# Altium PCB Sheet_1_2023-10-06.pcbdoc
Units mil, origin at the board's own origin, x right, y up, seen from the top; angles counter-clockwise.
Board outline 4947 x 4947 mil, 2 copper layers (Top Layer, Bottom Layer); 44 components, 45 nets, 134 pads, 41 vias.
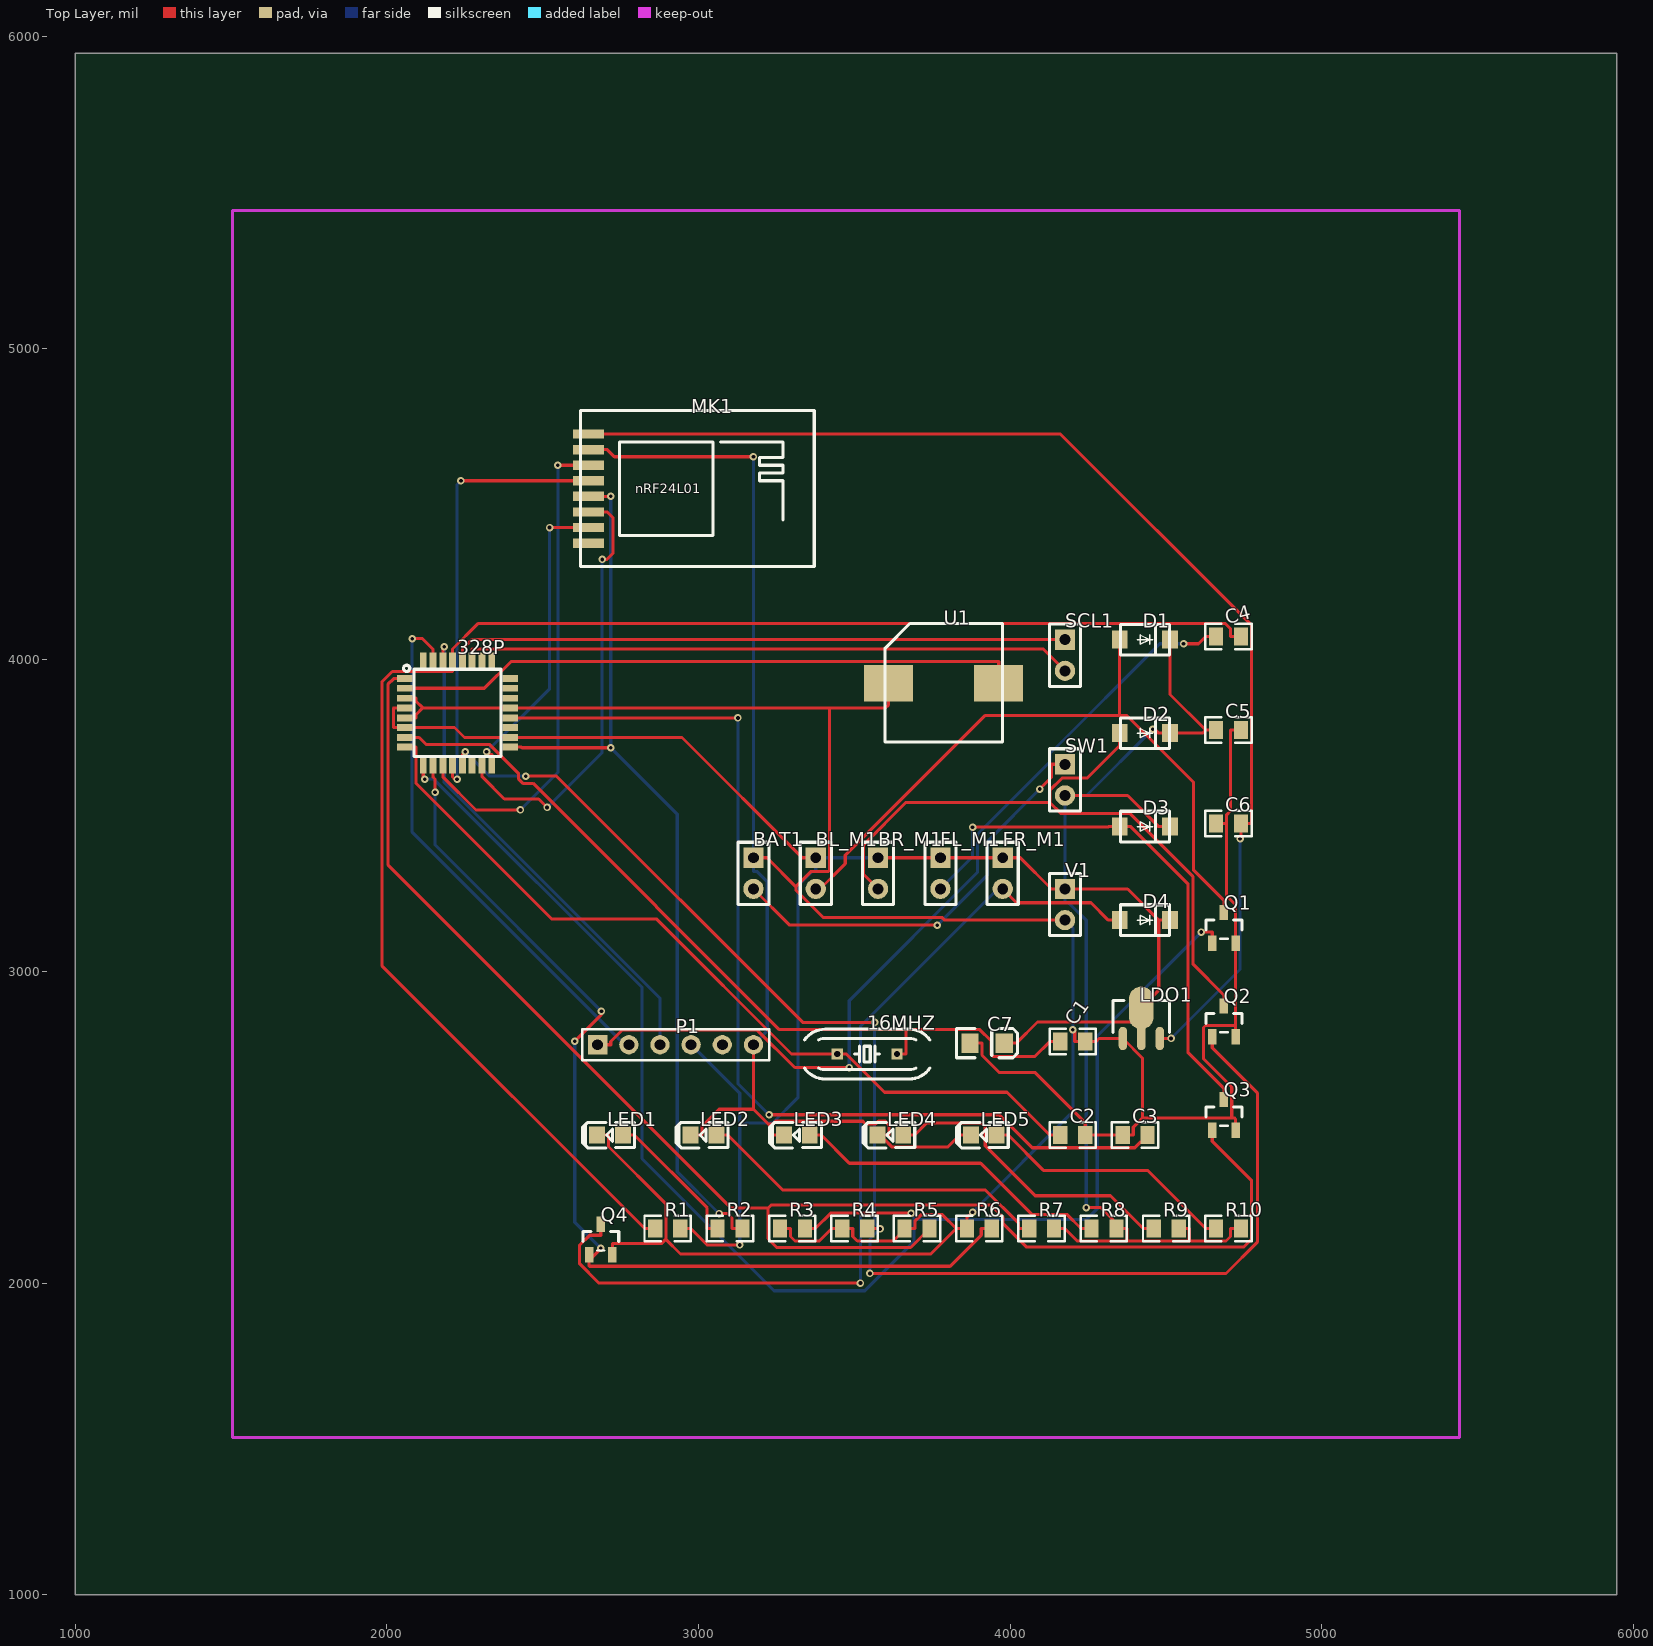
[diagram p0: Top Layer view]
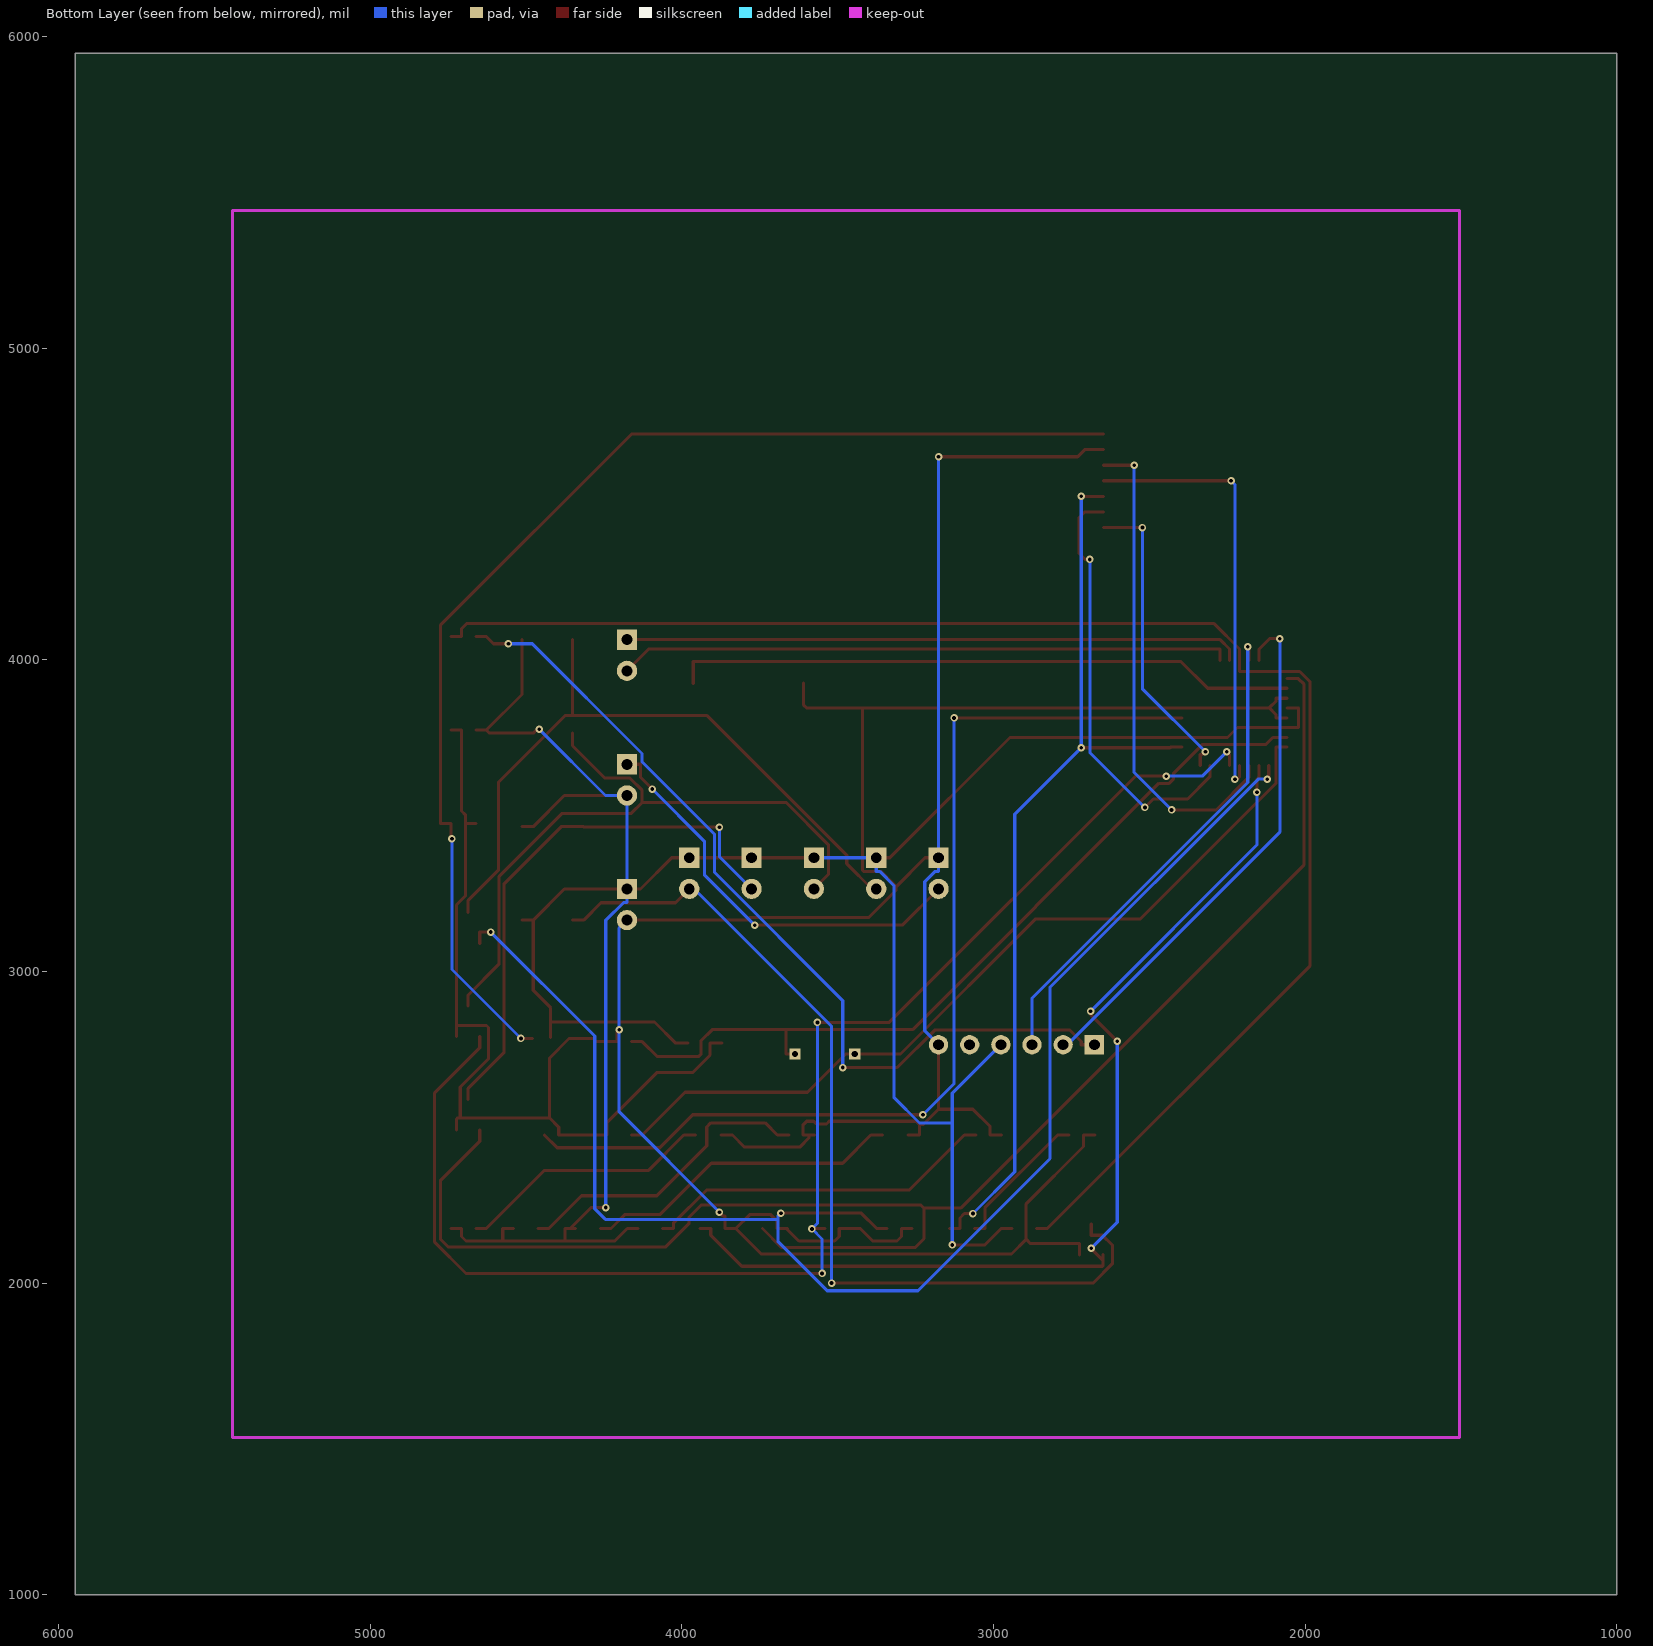
[diagram p1: Bottom Layer view, seen from below]

## Layer stack, top to bottom
Top Layer: signal copper (thickness not stored)
Dielectric: dielectric 12.6, FR-4, Dk 4.8
Bottom Layer: signal copper (thickness not stored)

## Board outline
5947,1000 1000,1000 1000,5947 5947,5947

## Components (designator, comment, footprint, x,y, rotation, side; value= is the part's Value field where it differs from the comment)
16MHZ "49S16.9344M20PF20PPMROHS" HC-49S 3541.48,2735.09 r0 top
328P "ATMEGA328P-AU" TQFP32 2226.48,3830.09 r0 top
BAT1 "Bat" H2-2.54 3176.48,3315.09 r0 top
BL_M1 "P125-1102A0BS116A3" H2-2.54 3376.48,3315.09 r0 top
BR_M1 "P125-1102A0BS116A3" H2-2.54 3576.48,3315.09 r0 top
C1 "22pF" 0805 4161.48,2775.09 r0 top
C2 "22pF" 0805 4161.48,2475.09 r0 top
C3 "0.1uF" 0805 4361.48,2475.09 r0 top
C4 "0.1uF" 0805 4661.48,4075.09 r0 top
C5 "0.1uF" 0805 4661.48,3775.09 r0 top
C6 "0.1uF" 0805 4661.48,3475.09 r0 top
C7 "10UF-16V-10%(TANT)" EIA3216 3926.48,2770.09 r0 top
D1 "SS12" SMA(DO-214AC) 4436.48,4065.09 r0 top
D2 "SS12" SMA(DO-214AC) 4436.48,3765.09 r0 top
D3 "SS12" SMA(DO-214AC) 4436.48,3465.09 r0 top
D4 "SS12" SMA(DO-214AC) 4436.48,3165.09 r0 top
FL_M1 "P125-1102A0BS116A3" H2-2.54 3776.48,3315.09 r0 top
FR_M1 "P125-1102A0BS116A3" H2-2.54 3976.48,3315.09 r0 top
LDO1 "HT7333-1" SOT-89(SOT-89-3) 4426.48,2885.09 r0 top
LED1 "Red" LED-0805 2716.48,2475.09 r0 top
LED2 "Red" LED-0805 3016.48,2475.09 r0 top
LED3 "Red" LED-0805 3316.48,2475.09 r0 top
LED4 "Red" LED-0805 3616.48,2475.09 r0 top
LED5 "Red" LED-0805 3916.48,2475.09 r0 top
MK1 "AS01-ML01S" NRF24L01_SMD+ 2646.48,4725.09 r0 top
P1 "Female header 1*6p" HDR-6X1/2.54 2876.48,2765.09 r0 top
Q1 "SI2302-TP" SOT-23(SOT-23-3) 4686.48,3190.09 r0 top
Q2 "SI2302-TP" SOT-23(SOT-23-3) 4686.48,2890.09 r0 top
Q3 "SI2302-TP" SOT-23(SOT-23-3) 4686.48,2590.09 r0 top
Q4 "SI2302-TP" SOT-23(SOT-23-3) 2686.48,2190.09 r0 top
R1 "10kΩ" 0805 2861.48,2175.09 r0 top
R2 "330" 0805 3061.48,2175.09 r0 top
R3 "10k" 0805 3261.48,2175.09 r0 top
R4 "10k" 0805 3461.48,2175.09 r0 top
R5 "10k" 0805 3661.48,2175.09 r0 top
R6 "10k" 0805 3861.48,2175.09 r0 top
R7 "330" 0805 4061.48,2175.09 r0 top
R8 "330" 0805 4261.48,2175.09 r0 top
R9 "330" 0805 4461.48,2175.09 r0 top
R10 "330" 0805 4661.48,2175.09 r0 top
SCL1 "P125-1102A0BS116A3" H2-2.54 4176.48,4015.09 r0 top
SW1 "SW" H2-2.54 4176.48,3615.09 r0 top
U1 "NO" "LEB9650 BUZZER 9.6X9.6X5MM" 3786.48,3925.09 r0 top
V1 "Vcc" H2-2.54 4176.48,3215.09 r0 top

## Footprints (in the part's own frame and the unit in brackets; to place one, negate y for a bottom-side part, rotate by r counter-clockwise, add the part's x,y. Pads: shape width x height; smd on the part's side, far side on the other; paste and mask are expansions set on the pad)
0805 [mm]
  rect 1.16x1.47 smd paste+0 mask+0.051: 1(0,0) 2(2.032,0)
  silkscreen extent -0.88,-1.04 2.89,1.04
EIA3216 [mil]
  rect 55.1x63 smd paste+0 mask+2: A(55,0) C(-55,0)
  silkscreen extent -98,-47 98,47
H2-2.54 [mil]
  rect 65x65 hole 35 paste+0 mask+2: 1(0,50)
  round 65 hole 35 paste+0 mask+2: 2(0,-50)
  silkscreen extent -50,-100 50,100
HC-49S [mil]
  rect 35.7x35.7 hole 20 paste+0 mask+2: 1(-96,0) 2(96,0)
  silkscreen extent -201,-80 201,80
HDR-6X1/2.54 [mil]
  rect 62x62 hole 35 paste+0 mask+2: 1(-200,0)
  round 62 hole 35 paste+0 mask+2: 2(-100,0) 3(0,0) 4(100,0) 5(200,0) 6(300,0)
  silkscreen extent -250,-50 350,50
"LEB9650 BUZZER 9.6X9.6X5MM" [mm]
  rect 4x3 smd paste+0 mask+0.051: +(4.5,0) -(-4.5,0)
  silkscreen extent -4.76,-4.8 4.8,4.88
LED-0805 [mil]
  rect 51.2x55.1 smd paste+0 mask+2: 1(40.7,0.05) 2(-42,0.05)
  silkscreen extent -88,-41 78,40
NRF24L01_SMD+ [mil]
  rect 100x30 smd paste+0 mask+2: 1(0,0) 2(0,-50) 3(0,-100) 4(0,-150) 5(0,-200) 6(0,-250) 7(0,-300) 8(0,-350)
  silkscreen extent -25,-425 725,75
SMA(DO-214AC) [mil]
  rect 50x57.9 smd paste+0 mask+2: 1(-85,0) 2(77,0)
  silkscreen extent -82,-49 75,49
SOT-23(SOT-23-3) [mm]
  rect 0.7x1.25 smd paste+0 mask+0.051: 1(-0.95,-2.52) 2(0.95,-2.52) 3(0,-0.02)
  silkscreen extent -1.46,-2.17 1.46,-0.62
SOT-89(SOT-89-3) [mm]
  oval 0.7x1.9 smd paste+0 mask+0.051: 1(-1.628,-2.54) 3(1.374,-2.54)
  oval 0.7x2.1 smd paste+0 mask+0.051: 2(-0.127,-2.441)
  oval 2x3.5 smd paste+0 mask+0.051: 2(-0.127,-0.041)
  silkscreen extent -2.43,-2.04 2.17,0.56
TQFP32 [mil]
  rect 50x22 smd paste+0 mask+2: 1(-169,110) 2(-169,79) 3(-169,47) 4(-169,16) 5(-169,-16) 6(-169,-47) 7(-169,-79) 8(-169,-110) 17(169,-110) 18(169,-79) 19(169,-47) 20(169,-16) 21(169,16) 22(169,47) 23(169,79) 24(169,110)
  rect 22x50 smd paste+0 mask+2: 9(-110,-169) 10(-79,-169) 11(-47,-169) 12(-16,-169) 13(16,-169) 14(47,-169) 15(79,-169) 16(110,-169) 25(110,169) 26(79,169) 27(47,169) 28(16,169) 29(-16,169) 30(-47,169) 31(-79,169) 32(-110,169)
  silkscreen extent -173,-140 140,153

## Via types
v1: diameter 24.02, hole 12.01, Top Layer to Bottom Layer, tented both sides, 41 vias

## Nets (pads, with @x,y where several pads share a name; then routed paths per layer and width w, separated by ;. In a path a pad name is that pad's centre, name@x,y a point inside that pad or via, vN(x,y) a via of type N, cw(c..) or ccw(c..) an arc to the next point about the centre after c; other vN are vias at no path point)
3.3V: C6.2 LDO1.3 MK1.1 | length 3872.4
  Top Layer w10: MK1.1 4161.38,4725.09 4775.38,4111.09 4775.38,3475.15 4775.31,3475.08 C6.2 4741.49,3429.53 v1(4738.22,3426.26) ; LDO1.3 v1(4516.8,2785.09)
  Bottom Layer w10: v1(4516.8,2785.09) 4738.22,3006.51 v1(4738.22,3426.26)
16MHZ_1: 16MHZ.1 328P.8 C2.1 | length 2687.7
  Top Layer w10: 328P.8 2093.47,3720.09 2093.47,3603.98 2528.29,3169.16 2864.7,3169.16 3298.77,2735.09 16MHZ.1 3459.9,2735.09 3474.32,2735.09 3596.98,2612.43 3990.31,2612.43 4127.66,2475.08 C2.1
16MHZ_2: 16MHZ.2 328P.7 C1.1 | length 2690.5
  Top Layer w10: 328P.7 2103.47,3751.09 2125.62,3728.94 2328.57,3728.94 2422.82,3634.69 2422.82,3617.51 2436.33,3604 2469.24,3604 3259.65,2813.59 3666.32,2813.59 ; 16MHZ.2 3666.32,2735.09 3666.32,2813.59 ; C1.1 4127.66,2775.08 4080.09,2727.51 3945.8,2727.51 3939.41,2733.9 3939.41,2777.21 3903.03,2813.59 3666.32,2813.59
328P_14: 328P.14
328P_19: 328P.19
328P_22: 328P.22
328P_23: 328P.23
328P_24: 328P.24
328P_25: 328P.25
328P_26: 328P.26
328P_32: 328P.32
BL: 328P.9 Q1.1 R3.2 | length 4838.9
  Top Layer w10: 328P.9 2116.48,3622.85 v1(2121.82,3617.51) ; R3.2 3375.31,2175.08 3424.63,2224.4 v1(3682.46,2224.4) ; v1(4613.6,3126.49) 4649.08,3126.49 Q1.1
  Bottom Layer w10: v1(2121.82,3617.51) 2150.63,3617.51 2818.69,2949.45 2818.69,2399.37 3242.55,1975.51 3533.6,1975.51 3692.36,2134.27 3692.36,2204.59 ; v1(3682.46,2224.4) 3692.36,2214.5 3692.36,2204.59 ; v1(4613.6,3126.49) 4280.07,2792.96 4280.07,2238.76 4245.9,2204.59 3692.36,2204.59
BR: 328P.13 Q2.1 R4.2 | length 4594.2
  Top Layer w10: 328P.13 2242.48,3697.08 2243.83,3697.08 v1(2251.77,3705.02) ; v1(2445.88,3627.06) 2544.29,3627.06 3334.7,2836.65 v1@3565.05,2836.65 ; R4.2 3581.53,2175.08 v1(3582.74,2173.87) ; v1(3550.36,2030.93) 4693.34,2030.93 4793.7,2131.29 4793.7,2610.67 4649.08,2755.29 Q2.1
  Bottom Layer w10: v1(2251.77,3705.02) 2329.73,3627.06 v1(2445.88,3627.06) ; v1(3550.36,2030.93) 3550.36,2141.49 v1(3582.74,2173.87) 3565.05,2191.56 v1@3565.05,2836.65
  other v1: 3565.05,2836.65
C3_2: 328P.20 C3.2 | length 3321.9
  Top Layer w10: 328P.20 v1(3126.48,3814.09) ; v1(3226.54,2540.39) 3965.2,2540.39 4071.3,2434.29 4400.7,2434.29 C3.2
  Bottom Layer w10: v1(3126.48,3814.09) 3126.48,2640.45 v1(3226.54,2540.39)
CE: 328P.11 MK1.3 | length 1583.3
  Top Layer w10: 328P.11 2179.48,3625.1 2286.04,3518.54 v1(2428.41,3518.54) ; v1(2548.62,4625.09) MK1.3
  Bottom Layer w10: v1(2428.41,3518.54) 2548.62,3638.75 v1(2548.62,4625.09)
CSN: 328P.12 MK1.4 | length 1425.4
  Top Layer w10: 328P.12 2210.48,3625.1 2218.13,3617.45 v1(2225.03,3617.45) ; v1(2237.59,4575.09) MK1.4
  Bottom Layer w10: v1(2225.03,3617.45) 2225.03,4562.53 v1(2237.59,4575.09)
CTS: P1.5
D1_1: BL_M1.2 D1.1 Q1.3 | length 2249.9
  Top Layer w10: BL_M1.2 3390.08,3265.09 3471.22,3346.23 3471.22,3373.29 3919.13,3821.2 4351.48,3821.2 ; D1.1 4351.48,3821.2 ; Q1.3 4686.48,3228.52 4588.57,3326.43 4588.57,3608.22 4375.59,3821.2 4351.48,3821.2
D2_1: BR_M1.2 D2.1 Q2.3 | length 2192.1
  Top Layer w10: BR_M1.2 3530.02,3311.55 3530.02,3407.25 3665.13,3542.36 4127.79,3542.36 ; D2.1 4351.48,3725.15 4247.09,3620.76 4166.98,3620.76 4127.79,3581.57 4127.79,3542.36 ; Q2.3 4686.48,2924.89 4586.89,3024.48 4586.89,3305.4 4384.63,3507.66 4162.49,3507.66 4127.79,3542.36
D3_1: D3.1 FL_M1.2 Q3.3 | length 1749.2
  Top Layer w10: v1(3879.73,3463.43) 4313.83,3463.43 4315.49,3465.09 D3.1 4387.47,3465.09 4570.83,3281.73 4570.83,2740.54 4686.48,2624.89 Q3.3
  Bottom Layer w10: FL_M1.2 3879.73,3368.34 v1(3879.73,3463.43)
D4_1: D4.1 FR_M1.2 Q4.3 | length 2983.7
  Top Layer w10: Q4.3 2686.48,2153.69 2650.88,2153.69 2617.64,2120.45 2617.64,2063.19 2680.83,2000 v1(3520,2000) ; FR_M1.2 4020.81,3220.76 4259.82,3220.76 4315.49,3165.09 D4.1
  Bottom Layer w10: v1(3520,2000) 3520,2824.21 3960.88,3265.09 FR_M1.2
DTR: C4.1 P1.1 | length 2846.2
  Top Layer w10: P1.1 2718.47,2765.09 2718.47,2775.59 2754.78,2811.9 3189.14,2811.9 3309.24,2691.8 v1(3483.78,2691.8) ; v1(4556.92,4052.15) 4604.73,4052.15 4627.66,4075.08 C4.1
  Bottom Layer w10: v1(3483.78,2691.8) 3483.78,2906.62 3895.79,3318.63 3895.79,3440.54 4128.15,3672.9 4128.15,3699.71 4480.59,4052.15 v1(4556.92,4052.15)
FL: 328P.1 Q3.1 R5.2 | length 5007.1
  Top Layer w10: 328P.1 2021.49,3940.09 2003.17,3921.77 2003.17,3343.05 3105.75,2240.47 3223,2240.47 ; R5.2 3680.81,2114.4 3251.22,2114.4 3223,2142.62 3223,2240.47 ; Q3.1 4649.08,2455.29 4775.38,2328.99 4775.38,2141.57 4749.31,2115.5 4053.52,2115.5 3976.81,2192.21 3976.81,2212.17 3938.27,2250.71 3233.24,2250.71 3223,2240.47
FR: 328P.10 Q4.1 R6.2 | length 3288.7
  Top Layer w10: 328P.10 2147.48,3625.1 2154.55,3618.03 v1(2154.55,3575.51) ; v1(2602.88,2775.95) 2688.4,2861.47 v1(2688.4,2872.5) ; Q4.1 Q4.1@2649.08,2073.09 ; v1(2686.48,2111.49) 2686.48,2110.49 Q4.1@2649.08,2073.09 ; R6.2 3907.66,2175.08 3907.66,2153.83 3807.82,2053.99 2650.38,2053.99 2649.08,2055.29 Q4.1@2649.08,2073.09
  Bottom Layer w10: v1(2154.55,3575.51) 2154.55,3406.35 v1(2688.4,2872.5) ; v1(2602.88,2775.95) 2602.88,2195.09 v1(2686.48,2111.49)
GND: 328P.3 328P.5 328P.21 BAT1.1 C1.2 C2.2 C3.1 C5.2 C6.1 C7.C LDO1.1 LED1.2 LED2.2 LED3.2 LED4.2 LED5.2 MK1.2 P1.6 Q1.2 Q2.2 Q3.2 Q4.2 R3.1 R4.1 R5.1 R6.1 U1.- V1.2 | length 13940.1
  Top Layer w10: 328P.5 2093.47,3814.09 2093.47,3824.62 2114.94,3846.09 ; 328P.3 2093.47,3877.09 2093.47,3867.56 2114.94,3846.09 ; MK1.2 2707.47,4675.09 2730.21,4652.35 v1@3176.48,4652.35 ; LED1.2 2711.07,2475.14 2711.07,2438.55 2895.38,2254.24 2895.38,2140.44 ; Q4.2 2723.88,2126.49 2881.43,2126.49 2895.38,2140.44 ; LED2.2 2986.21,2475.14 3011.07,2475.14 3011.07,2502.58 3066.33,2557.84 3176.48,2557.84 ; P1.6 3176.48,2557.84 ; BAT1.1 3219.97,3365.09 3312.68,3272.39 3361.82,3321.53 3417.13,3321.53 3420.04,3324.44 3420.04,3846.09 ; R3.1 3295.31,2175.08 3295.31,2149.71 3309.93,2135.09 3387.67,2135.09 3427.66,2175.08 R4.1 3495.31,2175.08 3495.31,2149.71 3509.93,2135.09 3624.74,2135.09 R5.1@3664.73,2175.08 ; LED3.2 3237.89,2475.14 3237.89,2509.71 ; 3312.67,3272.38 3312.67,3261.52 3401.29,3172.9 3782.31,3172.9 3790.12,3165.09 V1.2 ; LED4.2 LED4.2@3592.78,2475.14 ; U1.- 3609.32,3855.04 3600.37,3846.09 3420.04,3846.09 ; R5.1 R5.1@3664.73,2175.08 ; C7.C 3910.02,2770.09 3910.02,2731.55 3966.05,2675.52 4080.98,2675.52 4241.49,2515.01 C2.2 C3.1 4378.4,2475.08 4395.31,2475.08 4395.31,2500.45 4425.34,2530.48 ; LED5.2 3837.89,2475.14 3799.28,2436.53 3621.73,2436.53 3592.78,2465.48 LED4.2@3592.78,2475.14 ; v1(3879.73,2227.65) 3867.09,2215.01 3861.49,2215.01 R6.1 3827.66,2175.08 ; v1(4201.49,2813.44) 4207.66,2807.27 4207.66,2775.08 C1.2 4275.31,2775.08 4285.32,2785.09 LDO1.1 4425.34,2722.13 4425.34,2530.48 ; C6.1 4695.31,3475.08 ; Q3.2 4723.88,2526.49 4719.89,2530.48 4711.6,2530.48 ; Q2.2 4723.88,2826.49 4723.88,2826.56 ; C5.2 4707.66,3775.08 4707.66,3515.4 4695.31,3503.05 4695.31,3475.08 ; 2114.94,3846.09 328P.21 3420.04,3846.09 ; 2895.38,2140.44 2942.36,2093.46 3746.04,2093.46 3827.66,2175.08 ; 3176.48,2557.84 3224.61,2509.71 3237.89,2509.71 ; 3237.89,2509.71 3247.52,2519.34 3527.49,2519.34 3536.28,2510.55 3568.69,2510.55 3577.48,2519.34 3600.02,2519.34 3611.07,2508.29 3611.07,2475.14 LED4.2@3592.78,2475.14 ; R5.1@3664.73,2175.08 3667.49,2175.08 3673.48,2175.08 3678.4,2175.08 3695.31,2175.08 3695.31,2200.45 3714.73,2219.87 3782.87,2219.87 3827.66,2175.08 ; 4425.34,2530.48 4711.6,2530.48 ; 4695.31,3475.08 4695.31,3242.4 4723.88,3213.83 Q1.2 4723.88,3073.09 4723.88,3055.29 4723.88,2826.56 ; 4711.6,2530.48 4711.6,2629.48 4621.13,2719.95 4621.13,2820.54 4627.15,2826.56 4723.88,2826.56
  Bottom Layer w10: P1.6 3220.89,2809.5 3220.89,3288.06 3187.35,3321.6 3176.48,3321.6 3176.48,3343.35 BAT1.1 v1@3176.48,4652.35 ; v1(3879.73,2227.65) 4201.49,2549.41 v1(4201.49,2813.44) 4201.49,3140.08 V1.2
  other v1: 3176.48,4652.35
IRQ: MK1.8
LED1_1: LED1.1 R2.1 | length 467.4
  Top Layer w10: LED1.1 2793.77,2475.14 3027.66,2241.25 3027.66,2175.08 R2.1
MISO: 328P.16 MK1.7 | length 984.1
  Top Layer w10: v1(2319.87,3705.02) 2327.81,3697.08 2336.48,3697.08 328P.16 ; v1(2522.19,4425.09) MK1.7
  Bottom Layer w10: v1(2319.87,3705.02) 2522.19,3907.34 v1(2522.19,4425.09)
MOSI: 328P.15 MK1.6 | length 1398.9
  Top Layer w10: 328P.15 2305.48,3625.1 2376.96,3553.62 2487,3553.62 v1(2514.09,3526.53) ; MK1.6 2707.47,4475.09 2725.35,4457.21 2725.35,4341.9 2706.09,4322.64 v1(2690.78,4322.64)
  Bottom Layer w10: v1(2514.09,3526.53) 2690.78,3703.22 v1(2690.78,4322.64)
R7_1: LED2.1 R7.1 | length 1138.5
  Top Layer w10: LED2.1 3093.77,2475.14 3270.2,2298.71 3920.95,2298.71 4027.66,2192 4027.66,2175.08 R7.1
R8_1: LED3.1 R8.1 | length 1028.6
  Top Layer w10: LED3.1 3393.77,2475.14 3484.43,2384.48 3905.58,2384.48 4069.5,2220.56 4182.18,2220.56 4227.66,2175.08 R8.1
R9_1: LED4.1 R9.1 | length 996.4
  Top Layer w10: LED4.1 3693.77,2475.14 3732.95,2514.32 3907.29,2514.32 3920.5,2501.11 3920.5,2440.86 4080.97,2280.39 4322.35,2280.39 4427.66,2175.08 R9.1
R10_1: LED5.1 R10.1 | length 828.6
  Top Layer w10: LED5.1 3993.77,2475.14 4107.16,2361.75 4440.99,2361.75 4627.66,2175.08 R10.1
RESET: 328P.29 C4.2 R1.1 | length 5047
  Top Layer w10: R1.1 2827.66,2175.08 1983.84,3018.9 1983.84,3929.42 2017.45,3963.03 2210.41,3963.03 2210.48,3963.1 328P.29 2210.48,4035.08 2291.85,4116.45 4691.66,4116.45 4707.66,4100.45 4707.66,4075.08 C4.2
RX: 328P.30 P1.3 | length 1609.6
  Top Layer w10: 328P.30 2179.48,4038.03 v1(2184.01,4042.56)
  Bottom Layer w10: v1(2184.01,4042.56) 2184.01,3606.83 2876.48,2914.36 P1.3
S$14: 
S$18: 
S$20: 
SCL: 328P.28 SCL1.1 | length 1982.4
  Top Layer w10: 328P.28 2242.48,4035.08 2272.49,4065.09 SCL1.1
SCLK: 328P.17 MK1.5 R2.2 | length 2957
  Top Layer w10: 328P.17 2431.47,3720.09 2433.29,3718.27 v1(2718.53,3718.27) ; MK1.5 v1(2718.53,4525.09) ; v1(3065.93,2223.11) 3093.46,2223.11 3107.66,2208.91 3107.66,2175.08 R2.2
  Bottom Layer w10: v1(2718.53,4525.09) v1(2718.53,3718.27) 2932.03,3504.77 2932.03,2357.01 v1(3065.93,2223.11)
SDA: 328P.27 SCL1.2 | length 1968
  Top Layer w10: 328P.27 2273.48,4035.08 2273.55,4035.15 4106.42,4035.15 SCL1.2
SW1_1: BAT1.2 SW1.1 | length 1349.7
  Top Layer w10: BAT1.2 3292.84,3148.73 v1(3766.18,3148.73) ; v1(4095.67,3585.76) 4132.99,3623.08 4132.99,3665.09 SW1.1
  Bottom Layer w10: v1(3766.18,3148.73) 3928.06,3310.61 3928.06,3418.15 v1(4095.67,3585.76)
TX: 328P.31 P1.2 | length 1715.4
  Top Layer w10: v1(2081.08,4068.42) 2114.14,4068.42 2147.48,4035.08 328P.31
  Bottom Layer w10: v1(2081.08,4068.42) 2081.08,3447.21 2763.2,2765.09 P1.2
U1_+: 328P.2 U1.+ | length 2011.9
  Top Layer w10: 328P.2 2312.85,3909.09 2398.95,3995.19 3963.59,3995.19 3963.65,3995.13 U1.+
VCC: 328P.4 328P.6 328P.18 BL_M1.1 BR_M1.1 C5.1 C7.A D1.2 D2.2 D3.2 D4.2 FL_M1.1 FR_M1.1 LDO1.2 P1.4 R1.2 R7.2 R8.2 R9.2 R10.2 SW1.2 V1.1 | length 9247.2
  Top Layer w10: 328P.4 2021.49,3846.09 2021.42,3846.02 2021.42,3783.16 2021.49,3783.09 328P.6 2217.03,3783.09 2249.03,3751.09 328P.18 2946.99,3751.09 3332.99,3365.09 BL_M1.1 ; R1.2 2975.31,2175.08 3028.08,2122.31 v1(3132.32,2122.31) ; BR_M1.1 FL_M1.1 FR_M1.1 4032.99,3365.09 4132.99,3265.09 V1.1 4377.49,3265.09 4477.49,3165.09 ; C7.A 4020.02,2770.09 4088.07,2838.14 LDO1.2@4421.48,2838.14 ; R7.2 4175.31,2175.08 4215.29,2135.1 4375.31,2135.1 ; SW1.2 4377.49,3565.09 4477.49,3465.09 D3.2 ; v1(4244.52,2242.4) 4291.08,2242.4 R8.2@4358.4,2175.08 ; R8.2 R8.2@4358.4,2175.08 ; LDO1.2@4421.48,2788.99 LDO1.2@4421.48,2838.14 ; v1(4457.84,3777.47) 4465.11,3777.47 4477.49,3765.09 D2.2 4617.67,3765.09 4627.66,3775.08 ; D4.2 4477.49,3165.09 ; D1.2 4513.48,3889.26 4627.66,3775.08 ; R9.2 4575.31,2175.08 4575.31,2135.1 ; C5.1 4627.66,3775.08 ; R10.2 4707.66,2175.08 4707.66,2149.71 4693.05,2135.1 4575.31,2135.1 ; R8.2@4358.4,2175.08 4375.31,2175.08 4375.31,2135.1 ; 4375.31,2135.1 4575.31,2135.1 ; LDO1.2@4421.48,2838.14 4421.48,2883.49 4477.49,2939.5 4477.49,3165.09
  Bottom Layer w10: P1.4 3132.32,2609.25 3132.32,2514.01 ; v1(3132.32,2122.31) 3132.32,2514.01 ; BR_M1.1 BL_M1.1 3376.48,3321.6 3365.61,3321.6 3320.04,3276.03 3320.04,2596.62 3237.43,2514.01 3132.32,2514.01 ; v1(4244.52,2242.4) 4244.52,3164.43 4187.35,3221.6 4176.48,3221.6 V1.1 SW1.2 4245.46,3565.09 v1(4457.84,3777.47)

## Text inside footprints (layer, text, board x,y; h text height)
MK1: Top Overlay "nRF24L01" at 2796.48,4535.09 h30